# Altium PCB PC110.PcbDoc (part 23 of 24)
Units mm, origin at the board's own origin, x right, y up, seen from the top; angles counter-clockwise.
Board outline 150.05 x 107.35 mm, 10 copper layers (In2.Cu, F.Cu, B.Cu, In1.Cu, In3.Cu, In4.Cu, In5.Cu, In6.Cu, In7.Cu, In8.Cu); 936 components, 1434 nets, 4891 pads, 6088 vias.
Unrouted connection lines stored in the file: 2995.
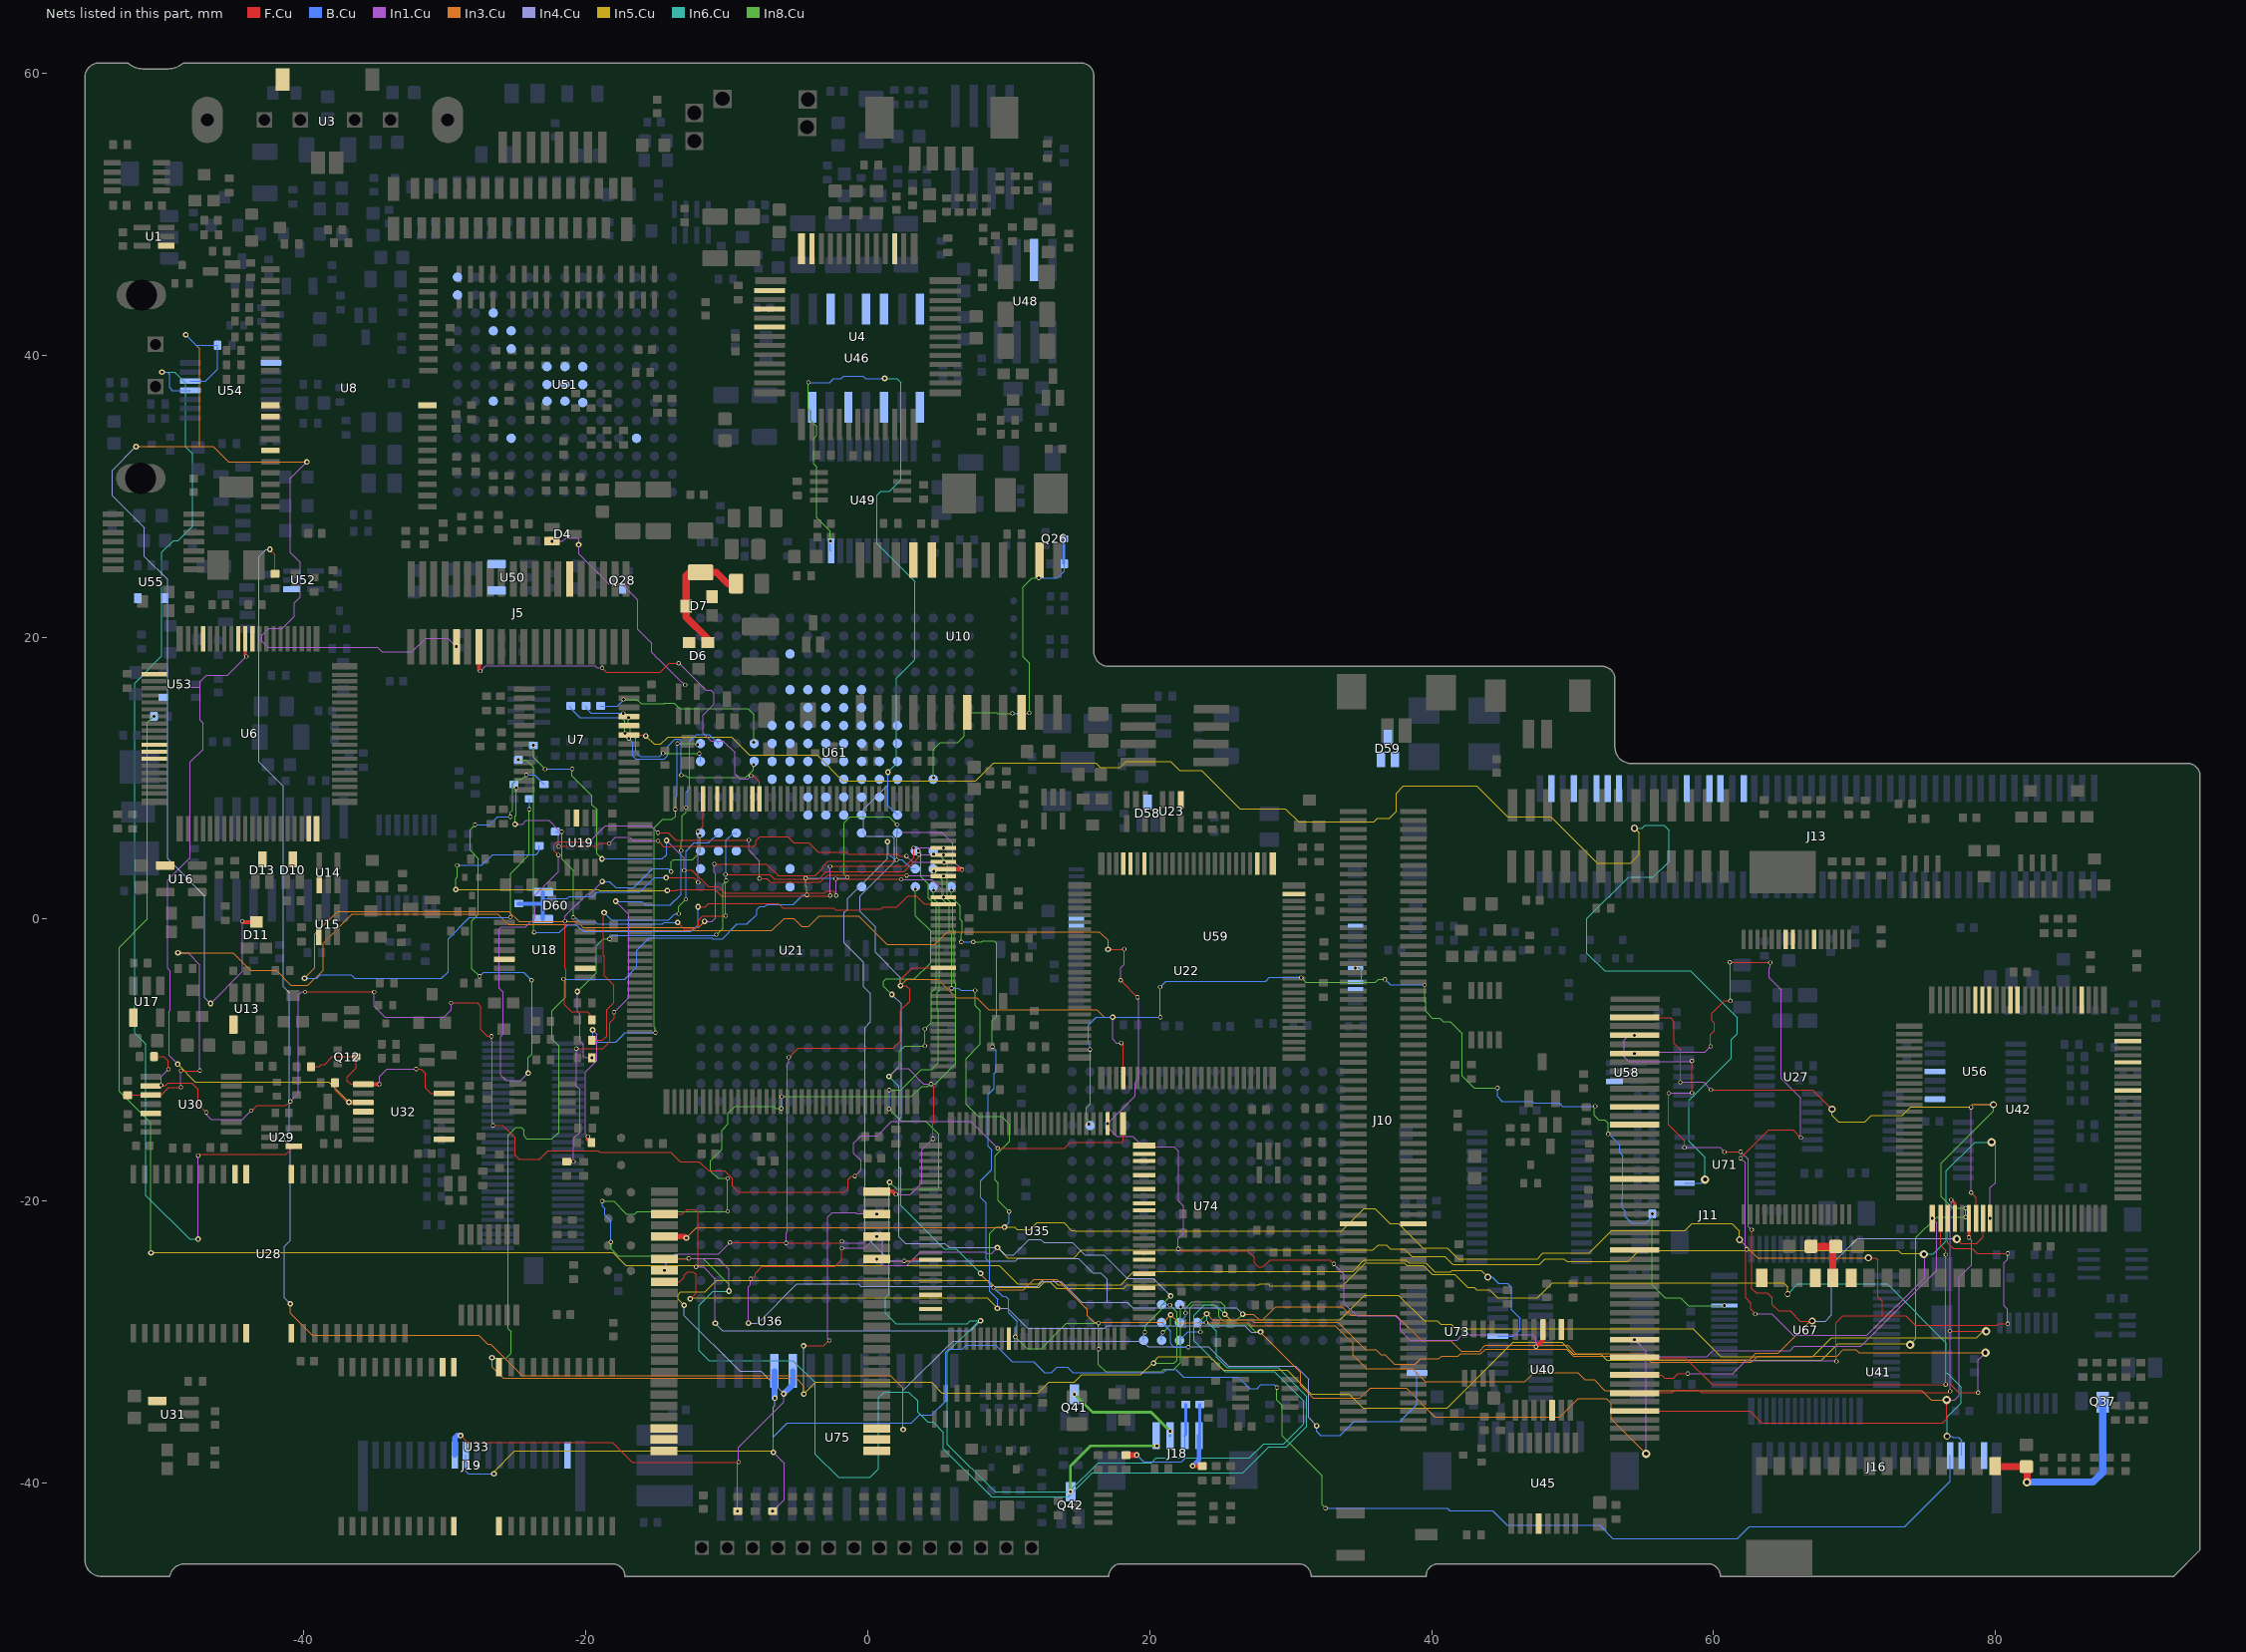
[diagram p30: the nets of this part, all layers, seen from the top]

## Via types
v1: diameter 0.3, hole 0.2, B.Cu to In8.Cu, tented both sides, 1934 vias
v2: diameter 0.4, hole 0.2, F.Cu to B.Cu, tented both sides, 1902 vias
v3: diameter 0.3, hole 0.2, F.Cu to In1.Cu, tented both sides, 1729 vias
v4: diameter 0.6, hole 0.3, F.Cu to B.Cu, tented both sides, 354 vias
v5: diameter 0.5, hole 0.3, F.Cu to B.Cu, tented both sides, 136 vias
v6: diameter 0.4, hole 0.2, B.Cu to In8.Cu, tented both sides, 12 vias
v7: diameter 0.3, hole 0.2, F.Cu to B.Cu, tented both sides, 6 vias
v8: diameter 0.6, hole 0.2, F.Cu to B.Cu, tented both sides, 4 vias
v9: diameter 0.5, hole 0.2, B.Cu to In8.Cu, tented both sides, 3 vias
v10: diameter 0.5, hole 0.2, F.Cu to B.Cu, tented both sides, 2 vias
v11: diameter 0.4, hole 0.3, F.Cu to B.Cu, tented both sides, 2 vias
v12: diameter 0.3, hole 0.2, F.Cu to In4.Cu, tented both sides, 2 vias
v13: diameter 0.6, hole 0.3, B.Cu to In8.Cu, tented both sides, 1 vias
v14: diameter 0.3, hole 0.2, F.Cu to In3.Cu, tented both sides, 1 vias

## Nets (pads, with @x,y where several pads share a name; then routed paths per layer and width w, separated by ;. In a path a pad name is that pad's centre, name@x,y a point inside that pad or via, vN(x,y) a via of type N, cw(c..) or ccw(c..) an arc to the next point about the centre after c; other vN are vias at no path point) (continued)
SD7: R380.1 U21.88 U22.54 U35.42 U36.32 U49.10 U59.35 U61.M12 U67.60 U74.N2 | length 224.4
  F.Cu w0.08: v3(-9.77,-22.93) -5.83,-22.93 v3(-5.8,-22.96) -5.79,-22.95 -1.93,-22.95 v3(-1.83,-22.85) ; v3(-5.6,-9.8) -4.94,-9.14 1.82,-9.14 2.33,-8.63 2.33,-6.46 2.975,-5.815 2.975,-4.985 2.7,-4.71 v2(2.33,-4.71) 2.33,-4.29 3.18,-3.44 U21.88@5.37,-3.44 ; v3(2.583,-24.235) 3.065,-24.235 3.16,-24.14 3.16,-24.13 3.19,-24.1 U35.42@4.46,-24.1 ; v3(17.98,-8.78) 18.13,-8.93 U22.54@18.13,-11.26
  In1.Cu w0.08: v3(-14.42,-24.91) -14.42,-24.54 -13.62,-23.74 -10.58,-23.74 v3(-9.77,-22.93) ; v3(-5.8,-22.96) -5.79,-22.95 -5.79,-22.25 -5.69,-22.15 -5.69,-10.25 -5.6,-10.16 v3(-5.6,-9.8) ; v3(-1.83,-22.85) -1.73,-22.95 -0.28,-22.95 0.5,-22.17 0.91,-22.17 1.05,-22.31 1.05,-23.83 1.455,-24.235 v3(2.583,-24.235) ; v2(17.37,-6.95) 17.37,-8.52 17.63,-8.78 v3(17.98,-8.78)
  In3.Cu w0.08: v2(2.33,-4.71) 2.77,-4.27 4.97,-4.27 6.27,-5.57 7.73,-5.57 8.57,-6.41 16.24,-6.41 16.78,-6.95 v2(17.37,-6.95)
  In4.Cu w0.08: v2(1.44,10.43) 1.44,9.53 -0.29,7.8 -0.29,6.07 -0.1,5.88 1.73,5.88 1.9,5.71 1.9,4.08 -0.55,1.63 -0.55,0.54 0.54,-0.55 0.54,-2.36 2.33,-4.15 v2(2.33,-4.71)
  In6.Cu w0.08: v2(1.21,38.36) 2.065,38.36 2.35,38.075 2.35,31.175 1.525,30.35 0.95,30.35 0.675,30.075 0.675,26.625 3.35,23.95 3.35,18.4 2.05,17.1 2.05,11.04 v2(1.44,10.43)
  In8.Cu w0.08: v1(-4.21,38.07) -4.21,36.22 -4.05,36.06 -4.05,35.36 -3.63,34.94 -3.63,34.32 -3.85,34.1 -3.85,32.31 -3.61,32.07 -3.61,28.48 -2.65,27.52 v1(-2.65,26.82) ; v1(15.68,-14.53) 15.68,-14.33 15.52,-14.17 15.52,-13.37 15.8,-13.09 15.8,-9.27 v1(15.77,-9.24) ; v1(20.74,-4.81) 20.74,-6.93 v1(20.76,-6.95) ; v1(30.75,-4.13) 31.08,-4.46 34.77,-4.46 ; v1(34.59,-3.46) 34.87,-3.46 35.03,-3.62 35.03,-4.46 34.77,-4.46 ; v1(36.69,-4.27) 36.22,-4.27 36.03,-4.46 34.77,-4.46 ; v1(39.5,-4.66) 39.5,-5.86 39.58,-5.94 39.58,-6.53 40.06,-7.01 40.56,-7.01 40.81,-7.26 41.3,-7.26 42.15,-8.11 42.15,-11.11 43.01,-11.97 v1(44.67,-11.97) ; v1(51.61,-13.26) 51.55,-13.32 51.55,-13.93 51.85,-14.23 52.28,-14.23 52.53,-14.48 v1(52.53,-15.23) ; v1(55.65,-20.89) 55.65,-25.92 56.57,-26.84 57.64,-26.84 58.21,-27.41 v1(60.76,-27.41)
  B.Cu w0.08: v1(-4.21,38.07) -2.69,38.07 -2.41,38.35 -1.89,38.35 -1.71,38.53 -0.33,38.53 -0.16,38.36 v2(1.21,38.36) ; v1(-2.65,26.82) -2.65,26.175 U49.10@-2.595,26.12 ; v2(1.44,10.43) 1.44,8.05 2.1,7.39 U61.M12@2.1,7.38 ; U74.N2@15.76,-14.61 v1(15.68,-14.53) 15.68,-14.545 U74.N2@15.765,-14.63 ; v1(15.77,-9.24) 15.77,-8.91 15.66,-8.8 15.66,-7.52 16.23,-6.95 v2(17.37,-6.95) v1(20.76,-6.95) ; v1(20.74,-4.81) 21.15,-4.4 28.23,-4.4 28.5,-4.13 v1(30.75,-4.13) ; v1(36.69,-4.27) 37.08,-4.66 v1(39.5,-4.66) ; v1(44.67,-11.97) 44.67,-12.58 45.01,-12.92 47.15,-12.92 47.27,-13.04 49.06,-13.04 49.28,-13.26 v1(51.61,-13.26) ; v1(52.53,-15.23) 52.57,-15.23 53.33,-15.99 53.33,-16.53 53.56,-16.76 53.56,-19.78 53.5,-19.84 53.5,-20.5 53.71,-20.71 53.71,-21.1 54.17,-21.56 55.21,-21.56 55.65,-21.12 v1(55.65,-20.89)
SD8: J11.44 U36.18 U42.9 U61.N16 U74.A5 | length 209.8
  F.Cu w0.08: v3(59.79,-9.02) 59.79,-8.18 60.07,-7.9 60.07,-7.39 59.87,-7.19 59.87,-6.67 60.75,-5.79 v3(61.19,-5.79) ; v3(61.15,-3.06) 61.16,-3.07 v3(64.02,-3.07) ; v3(61.91,-16.95) 63.91,-14.95 65.65,-14.95 v3(66.19,-15.49) ; v3(62.34,-23.42) 62.27,-23.49 62.27,-26.87 62.64,-27.24 62.64,-27.68 v3(62.96,-28)
  In1.Cu w0.08: v3(0.63,-24.11) 1.09,-24.57 2.77,-24.57 3.74,-23.6 8.31,-23.6 8.42,-23.71 8.78,-23.71 v2(9.2,-23.29) ; v3(54.39,-9.53) 54.48,-9.44 59.37,-9.44 v3(59.79,-9.02) ; v3(61.15,-3.06) 61.19,-3.1 v3(61.19,-5.79) ; v3(61.91,-16.95) 62.24,-17.28 62.24,-23.32 v3(62.34,-23.42) ; v3(62.96,-28) 64.12,-28 65.64,-29.52 70.87,-29.52 74.96,-25.43 74.96,-23.8 v4(74.92,-23.76) ; v3(64.02,-3.07) 64.02,-3.38 63.93,-3.47 63.93,-4.15 64.79,-5.01 64.79,-11.29 66.19,-12.69 v3(66.19,-15.49) ; v3(79.61,-21.225) 79.61,-19.05 79.99,-18.67 79.99,-16.08 v4(79.72,-15.81)
  In4.Cu w0.08: v2(1.71,-5.34) 2.38,-6.01 2.38,-14.02 2.2,-14.2 2.2,-22.53 2.67,-23 5.48,-23 5.77,-23.29 v2(9.2,-23.29) 9.73,-23.82 10.34,-23.82 11.45,-22.71 12.27,-22.71 12.5,-22.94 14.51,-22.94 15.4,-23.83 16.76,-23.83 18.4,-25.47 20.24,-25.47 v2(21.49,-26.72)
  In5.Cu w0.08: v2(9.2,-23.29) 9.2,-23.3 9.91,-24.01 14.61,-24.01 15.15,-23.47 35.85,-23.47 36.21,-23.11 36.78,-23.11 37.07,-23.4 38.08,-23.4 38.6,-23.92 40.94,-23.92 41.5,-24.48 47.65,-24.48 48.04,-24.09 49.39,-24.09 49.59,-24.29 53.93,-24.29 54.71,-23.51 73.11,-23.51 73.32,-23.72 74.88,-23.72 v4(74.92,-23.76)
  In6.Cu w0.08: v4(74.92,-23.76) 75.59,-23.76 76.51,-22.84 76.51,-17.84 78.54,-15.81 v4(79.72,-15.81)
  In8.Cu w0.08: v2(1.71,-5.34) 1.13,-4.76 1.13,-4.4 1.29,-4.24 3.31,-4.24 4.46,-3.09 4.46,-0.84 3.38,0.24 v1(3.38,2.12) ; v1(19.67,-29.29) 19.67,-28.85 20.8,-27.72 20.8,-27.41 v2(21.49,-26.72)
  B.Cu w0.08: U61.N16@3.37,2.3 3.38,2.29 v1(3.38,2.12) ; U74.A5@19.575,-29.87 19.575,-29.385 v1(19.67,-29.29)
SD9: J11.46 U36.20 U42.8 U61.N15 U74.B6 | length 213
  F.Cu w0.08: v3(-8.31,-25.51) -8.2,-25.51 -7.98,-25.29 -7.98,-25.11 -7.95,-25.08 -7.95,-25.07 -7.515,-24.635 -2.305,-24.635 -1.84,-24.17 v3(-1.84,-23.33) ; v3(56.82,-12.34) 56.82,-14.6 57.93,-15.71 v3(57.93,-16.19) ; v3(58.47,-12.31) v3(58.47,-10.06) ; v3(60.76,-16.51) 61.89,-16.51 v3(61.91,-16.49) ; v3(62.7,-22.03) 62.7,-26.12 62.69,-26.13 62.69,-26.17 63.03,-26.51 63.82,-26.51 64.16,-26.85 64.16,-27.34 64.61,-27.79 65.43,-27.79 66.14,-28.5 v5(66.99,-28.5) ; v4(77.25,-22.69) 77.56,-23 78.65,-23 79.11,-22.54 U42.8@79.11,-21.225
  In1.Cu w0.08: v2(-8.46,-28.65) -8.46,-26.07 -8.31,-25.92 v3(-8.31,-25.51) ; v3(-1.84,-23.33) -0.19,-23.33 v3(0.63,-22.51) ; v3(54.39,-8.23) 54.02,-8.23 53.67,-8.58 53.67,-9.77 53.99,-10.09 58.44,-10.09 v3(58.47,-10.06) ; v3(56.82,-12.34) 56.85,-12.31 v3(58.47,-12.31) ; v3(57.93,-16.19) 60.44,-16.19 v3(60.76,-16.51) ; v3(61.91,-16.49) 62.46,-17.04 62.46,-21.79 v3(62.7,-22.03)
  In3.Cu w0.08: v2(26.6,-28.01) 27.35,-28.01 27.76,-28.42 28.04,-28.42 28.96,-27.5 33.64,-27.5 34.23,-28.09 37.48,-28.09 39.29,-29.9 41.36,-29.9 42.11,-30.65 43.39,-30.65 43.81,-30.23 49.66,-30.23 50.24,-30.81 55.2,-30.81 55.62,-31.23 62.55,-31.23 63,-30.78 64.58,-30.78 66.86,-28.5 v5(66.99,-28.5)
  In4.Cu w0.08: v2(-8.46,-28.65) -7.79,-28.65 -5.02,-25.88 -0.66,-25.88 -0.5,-26.04 12.05,-26.04 12.4,-25.69 13.69,-25.69 15.19,-27.19 16.98,-27.19 ; v2(1.4,5.5) 1.4,4.29 -1.44,1.45 -1.44,0.69 -1.67,0.46 -1.67,-1.68 -0.29,-3.06 -0.29,-4.79 0.21,-5.29 0.21,-7.28 -0.19,-7.68 -0.19,-22.46 1.58,-24.23 10.49,-24.23 10.66,-24.06 14.94,-24.06 15.96,-25.08 16.52,-25.08 16.98,-25.54 16.98,-27.19 ; v2(26.6,-28.01) 26.16,-27.57 18.78,-27.57 18.4,-27.19 16.98,-27.19 ; v5(66.99,-28.5) 67.95,-28.5 68.38,-28.07 68.38,-24.49 70.21,-22.66 77.22,-22.66 v4(77.25,-22.69)
  In8.Cu w0.08: v1(22.73,-30.36) 22.85,-30.24 22.85,-27.57 23.08,-27.34 24.53,-27.34 24.9,-27.71 24.9,-28.19 25.2,-28.49 26.12,-28.49 v2(26.6,-28.01)
  B.Cu w0.08: v2(1.4,5.5) 1.47,5.43 1.47,4.66 1.92,4.21 2.44,4.21 3.08,3.57 U61.N15@3.37,3.57 ; U74.B6@20.84,-28.58 21.47,-29.21 21.47,-30.12 21.71,-30.36 v1(22.73,-30.36)
SD10: J11.48 U36.22 U42.7 U61.M13 U74.C6 | length 263.7
  F.Cu w0.08: v2(-4.55,-30.26) -3.11,-30.26 v3(-2.72,-29.87) ; J11.48@54.39,-6.98 56.94,-6.98 57.21,-7.25 57.21,-8.82 57.64,-9.25 v3(57.64,-11.56) ; v3(59.81,-12.1) 67.02,-12.1 v5(68.4,-13.48) ; v3(78.26,-19.39) 78.61,-19.74 U42.7@78.61,-21.225 ; v3(78.26,-13.34) 78.45,-13.15 v5(79.85,-13.15)
  In1.Cu w0.08: v3(-2.72,-29.87) -2.85,-29.74 -2.85,-21.13 -2.53,-20.81 -0.87,-20.81 -0.79,-20.89 0.61,-20.89 v3(0.63,-20.91) ; v3(57.64,-11.56) 59.27,-11.56 v3(59.81,-12.1) ; v3(78.26,-19.39) v3(78.26,-13.34)
  In3.Cu w0.08: v2(-26.65,-31.1) -26.65,-31.77 -25.86,-32.56 -5.08,-32.56 -4.53,-33.11 v2(-4.53,-33.68)
  In4.Cu w0.08: v2(-4.55,-30.26) -4.53,-30.28 v2(-4.53,-33.68)
  In5.Cu w0.08: v2(-4.53,-33.68) -3.69,-32.84 4.5,-32.84 5.26,-33.6 12.07,-33.6 12.84,-32.83 14.66,-32.83 15.18,-32.31 19.37,-32.31 20.2,-31.48 v2(20.27,-31.48) 20.27,-31.41 20.64,-31.04 24.23,-31.04 24.42,-31.23 24.48,-31.23 25.24,-31.99 29.77,-31.99 31.47,-33.69 34.15,-33.69 35.14,-34.68 41.11,-34.68 45.78,-30.01 49.22,-30.01 50.05,-30.84 51.98,-30.84 52.41,-31.27 67.67,-31.27 68.83,-30.11 73.86,-30.11 v4(73.94,-30.19) ; v5(68.4,-13.48) 68.4,-13.93 68.86,-14.39 70.73,-14.39 71.21,-13.91 73.39,-13.91 73.98,-13.32 78.21,-13.32 78.38,-13.15 v5(79.85,-13.15)
  In8.Cu w0.08: v2(-26.65,-31.1) -26.63,-31.12 -25.63,-31.12 -25.29,-30.78 -25.29,-29.26 -25.51,-29.04 -25.51,-15.33 -24.95,-14.77 -24.59,-14.77 -24.39,-14.97 -24.39,-15.37 -24.18,-15.58 -22.39,-15.58 -21.91,-15.1 -21.91,-9.01 -22.4,-8.52 -22.4,-6.5 -21.43,-5.53 -21.43,-4.4 v1(-21.58,-4.25) ; v1(-4.4,2.91) -4.4,2.36 -4.31,2.27 v1(-4.31,1.72) ; v1(-1.45,2.96) -1.67,3.18 -1.67,6.85 -1.25,7.27 1.52,7.27 v1(2.08,6.71) ; v2(20.27,-31.48) 21.73,-31.48 21.95,-31.26 21.95,-27.88 v1(21.44,-27.37) ; v4(73.94,-30.19) 73.94,-30.18 74.35,-29.77 74.35,-22.59 75.81,-21.13 v1(77.87,-21.13) ; v1(77.88,-20.49) 76.96,-20.49 76.13,-19.66 76.13,-17.31 79.85,-13.59 v5(79.85,-13.15)
  B.Cu w0.08: v1(-21.58,-4.25) -17.25,-4.25 -16.39,-3.39 -16.39,-2.22 -15.51,-1.34 -11.06,-1.34 -11.02,-1.38 -10.3,-1.38 -9.27,-0.35 -8.56,-0.35 -7.86,0.35 -7.86,0.69 -7.66,0.89 -7.28,0.89 -7.12,1.05 -5.27,1.05 -4.6,1.72 v1(-4.31,1.72) ; v1(-4.4,2.91) -1.5,2.91 v1(-1.45,2.96) ; v1(2.08,6.71) 2.1,6.69 U61.M13@2.1,6.11 ; U74.C6@20.84,-27.31 21.38,-27.31 v1(21.44,-27.37) ; v1(77.87,-21.13) 77.88,-21.12 v1(77.88,-20.49)
SD11: J11.4 U36.24 U42.6 U61.N14 U74.A6 | length 165.4
  F.Cu w0.08: v3@1.99,-19.52 v3(2,-19.52) ; v3(4.49,-11.69) 4.69,-11.89 4.69,-14.42 4.63,-14.48 v3(4.63,-15.58) ; J11.4@54.39,-34.88 62.55,-34.88 63.41,-35.74 76.26,-35.74 76.54,-35.46 v4(76.54,-34.09)
  F.Cu w0.2: v3(78.11,-22.58) U42.6@78.11,-21.225
  F.Cu w0.3: U36.24@0.63,-19.31 1.78,-19.31 v3@1.99,-19.52
  In1.Cu w0.08: v2(1.51,-11.15) 1.55,-11.15 2.1,-10.6 2.87,-10.6 3.96,-11.69 v3(4.49,-11.69) ; v3(2,-19.52) 3.03,-19.52 3.84,-18.71 3.84,-16.37 v3(4.63,-15.58) ; v4(76.54,-34.09) 77.11,-34.09 77.43,-33.77 77.43,-33.71 77.42,-33.7 77.42,-25.4 78.31,-24.51 78.31,-22.78 v3(78.11,-22.58)
  In3.Cu w0.08: v2(8,-25.12) 8,-25.19 9.09,-26.28 11.067,-26.28 11.797,-25.55 13.43,-25.55 15.59,-27.71 15.59,-28.12 16.05,-28.58 20.97,-28.58 v2(21.49,-28.06) 22.05,-28.62 27,-28.62 27.2,-28.82 33.15,-28.82 34.42,-30.09 34.42,-30.91 35.39,-31.88 38.63,-31.88 39.56,-32.81 46.61,-32.81 47.27,-32.15 50.37,-32.15 50.88,-32.66 51.52,-32.66 52.28,-33.42 74.78,-33.42 75.45,-34.09 v4(76.54,-34.09)
  In6.Cu w0.08: v2(1.51,-11.15) 2.22,-11.86 2.22,-17.54 2.34,-17.66 2.34,-20.31 5.43,-23.4 6.28,-23.4 v2(8,-25.12)
  In8.Cu w0.08: v2(1.51,-11.15) 2.25,-10.41 2.25,-9.37 2.63,-8.99 v1(4.05,-8.99) ; v1(3.59,4.85) 3.77,4.67 3.77,3.02 4.29,2.5 4.29,1.51 4.87,0.93 4.87,-4.81 4.5,-5.18 4.5,-7.33 v1(4.05,-7.78) ; v1(20.93,-29.3) 20.94,-29.3 21.49,-28.75 v2(21.49,-28.06)
  B.Cu w0.08: v1(4.05,-8.99) v1(4.05,-7.78) ; U74.A6@20.845,-29.87 20.845,-29.385 v1(20.93,-29.3)
SD12: J11.6 U36.27 U42.4 U61.P16 U74.B7 | length 234.2
  F.Cu w0.08: U36.27@-14.42,-20.91 -13.15,-20.91 -12.82,-20.58 -12.23,-20.58 -12.05,-20.76 -12.05,-24.53 v3(-12.18,-24.66) ; J11.6@54.39,-33.63 54.435,-33.585 57.05,-33.585 57.05,-33.57 57.24,-33.38 58.925,-33.38 59.13,-33.585 76.685,-33.585 v3(76.78,-33.49) ; v3(76.77,-29.21) 76.8,-29.24 v4(79.34,-29.24)
  F.Cu w0.2: v3(76.85,-19.9) 77.11,-20.16 U42.4@77.11,-21.225
  In1.Cu w0.08: v3(-12.18,-24.66) -11.66,-24.66 -10.82,-25.5 v2(-10.82,-28.66) ; v3(76.78,-33.49) 76.78,-29.22 v3(76.77,-29.21) 76.77,-20.64 76.85,-20.56 v3(76.85,-19.9)
  In4.Cu w0.08: v2(-10.82,-28.66) -10.3,-29.18 7.3,-29.18 v2(8,-28.48)
  In5.Cu w0.08: v2(25.33,-28.02) 25.72,-28.41 33.49,-28.41 35.24,-26.66 37.64,-26.66 39.47,-28.49 40.41,-28.49 40.66,-28.74 41.38,-28.74 41.69,-29.05 58.54,-29.05 60.53,-31.04 67.02,-31.04 68.36,-29.7 78.66,-29.7 79.12,-29.24 v4(79.34,-29.24)
  In6.Cu w0.08: v2(1.55,-18.65) 1.49,-18.71 1.49,-26.62 1.25,-26.86 1.25,-27.94 2,-28.69 7.06,-28.69 7.27,-28.48 v2(8,-28.48) 7.89,-28.48 5.66,-30.71 5.66,-37.26 9.02,-40.62 14.26,-40.62 16.34,-38.54 20.13,-38.54 20.45,-38.22 27.07,-38.22 28.08,-37.21 29.52,-37.21 30.92,-35.81 30.92,-34.17 28.83,-32.08 25.33,-32.08 23.15,-29.9 23.15,-28.08 23.88,-27.35 24.66,-27.35 v2(25.33,-28.02)
  In8.Cu w0.08: v1(1.51,-13.45) 2.36,-14.3 4.09,-14.3 5.03,-15.24 5.03,-19.05 4.92,-19.16 2.06,-19.16 v2(1.55,-18.65) ; v1(1.53,-12.11) 2.35,-12.11 3.8,-10.66 4.53,-10.66 5.01,-10.18 5.01,-6.44 4.95,-6.38 4.95,-5.18 5.07,-5.06 5.07,1.06 4.67,1.46 v1(4.67,2.06) ; v1(22.54,-27.93) 22.54,-27.6 23,-27.14 25.03,-27.14 25.33,-27.44 v2(25.33,-28.02)
  B.Cu w0.08: v1(1.51,-13.45) 1.53,-13.43 v1(1.53,-12.11) ; U61.P16@4.64,2.3 4.67,2.27 v1(4.67,2.06) ; U74.B7@22.11,-28.58 22.54,-28.15 v1(22.54,-27.93)
SD13: J11.8 U36.29 U42.3 U61.P15 U74.C7 | length 199.3
  F.Cu w0.08: J11.8@54.39,-32.33 56.31,-32.33 56.53,-32.55 57.15,-32.55 57.47,-32.23 v3(58.16,-32.23) ; v3(68.72,-31.36) 68.69,-31.33 68.69,-28.61 69.17,-28.13 71.67,-28.13 71.97,-28.13 ; v5(70.98,-24.02) 71.51,-24.02 71.67,-24.18 71.67,-26.79 71.97,-27.09 71.97,-28.13 ; U42.3@76.61,-21.225 76.61,-22.98 76.98,-23.35 78.33,-23.35 78.69,-23.71 v3(80.86,-23.71) ; v3(80.86,-28.7) 80.2,-28.7 80.11,-28.79 74.31,-28.79 73.65,-28.13 71.97,-28.13
  F.Cu w0.4: U36.29@-14.42,-22.51 -12.97,-22.51 v2(-12.87,-22.61)
  In1.Cu w0.08: v3(58.16,-32.23) 61.38,-32.23 62.29,-31.32 68.68,-31.32 v3(68.72,-31.36) ; v3(80.86,-28.7) 80.86,-27.68 80.6,-27.42 80.6,-24.38 80.86,-24.12 v3(80.86,-23.71)
  In3.Cu w0.08: v2(-12.87,-22.61) -12.13,-21.87 9.48,-21.87 9.51,-21.84 v2(9.7,-21.84) ; v5(61.84,-22.73) 63.13,-24.02 v5(70.98,-24.02)
  In5.Cu w0.08: v2(9.7,-21.84) 10.42,-21.84 10.6,-22.02 11.52,-22.02 12.01,-21.53 13.9,-21.53 14.46,-22.09 14.66,-22.09 14.685,-22.115 33.595,-22.115 35.19,-20.52 35.99,-20.52 37.05,-21.58 37.65,-21.58 39.39,-23.32 41.1,-23.32 41.87,-24.09 47.5,-24.09 47.91,-23.68 51.17,-23.68 52.77,-22.08 57.96,-22.08 58.45,-21.59 61.31,-21.59 61.84,-22.12 v5(61.84,-22.73)
  In8.Cu w0.08: v1(4.69,3.39) 5.29,2.79 5.29,1.42 5.79,0.92 5.79,-0.81 5.95,-0.97 5.95,-4.89 v1(5.94,-4.9) ; v1(7.62,-5.05) 7.62,-6.13 7.99,-6.5 7.99,-8.87 6.99,-9.87 6.99,-13.14 7.82,-13.97 9.49,-13.97 10.07,-14.55 10.07,-15.74 9.02,-16.79 9.02,-18.5 9.25,-18.73 9.25,-19.96 v1(10.03,-20.74) ; v1(8.92,-26.13) 8.65,-25.86 8.65,-22.29 9.1,-21.84 v2(9.7,-21.84) ; v1(10.46,-29.62) 11.29,-30.45 12.31,-30.45 14.11,-28.65 v1(16.37,-28.65) ; v1(16.37,-30.495) 16.37,-31.58 16.88,-32.09 20.86,-32.09 21.03,-31.92 21.72,-31.92 22.2,-31.44 v1(22.2,-27.5)
  B.Cu w0.08: U61.P15@4.64,3.57 4.69,3.52 v1(4.69,3.39) ; v1(5.94,-4.9) 6.43,-4.9 6.58,-5.05 v1(7.62,-5.05) ; v1(8.92,-26.13) 9.55,-26.76 9.78,-26.76 9.99,-26.97 9.99,-27.93 10.58,-28.52 10.58,-28.84 10.53,-28.89 10.53,-29.55 v1(10.46,-29.62) ; v2(9.7,-21.84) 10.03,-21.51 v1(10.03,-20.74) ; v1(16.37,-30.495) v1(16.37,-28.65) ; U74.C7@22.11,-27.34 22.2,-27.43 v1(22.2,-27.5) ; U74.C7@22.11,-27.31 22.2,-27.4 v1(22.2,-27.5) ; U74.C7@22.115,-27.33 22.2,-27.415 v1(22.2,-27.5)
SD14: J11.10 U36.31 U42.2 U61.P14 U74.A7 | length 253.6
  F.Cu w0.08: U36.31@-14.42,-24.11 -12.75,-24.11 v3(-12.7,-24.06) ; J11.10@54.39,-31.08 57.98,-31.08 59.9,-33 v3(76.46,-33) 76.81,-33 77.38,-33.57 v3(78.76,-33.57) ; U42.2@76.11,-21.225 76.11,-23.15 76.47,-23.51 v3(76.47,-23.79)
  In1.Cu w0.08: v3(-12.7,-24.06) -10.61,-24.06 -9.84,-24.83 v2(-9.84,-26.38) ; v3(76.46,-33) 76.47,-32.99 v3(76.47,-23.79) ; v3(78.76,-33.57) 78.76,-31.27 v4(79.28,-30.75)
  In3.Cu w0.08: v2(24.05,-27.99) 24.46,-28.4 27.21,-28.4 27.4,-28.59 33.37,-28.59 35.32,-30.54 36.06,-30.54 36.4,-30.88 36.69,-30.88 37.35,-31.54 38.86,-31.54 39.22,-31.18 40.52,-31.18 40.71,-30.99 41.9,-30.99 42.06,-30.83 43.49,-30.83 43.84,-30.48 49.55,-30.48 50.05,-30.98 55.07,-30.98 55.52,-31.43 62.68,-31.43 63.13,-30.98 68.74,-30.98 69.18,-30.54 70.09,-30.54 70.3,-30.75 v4(79.28,-30.75)
  In6.Cu w0.08: v2(-9.84,-26.38) -10.97,-26.38 -11.97,-27.38 -11.97,-30.59 -11.26,-31.3 -5.3,-31.3 -3.72,-32.88 -3.72,-37.96 -2.08,-39.6 0.15,-39.6 0.78,-38.97 0.78,-33.92 1.18,-33.52 2.895,-33.52 3.55,-34.175 3.55,-34.95 4.27,-35.67 4.645,-35.67 5.36,-36.385 5.36,-37.55 8.78,-40.97 14.22,-40.97 15.93,-39.26 26.61,-39.26 28.45,-37.42 29.7,-37.42 31.15,-35.97 31.15,-33.86 29.11,-31.82 25.49,-31.82 24.73,-31.06 24.73,-29.22 24.05,-28.54 v2(24.05,-27.99)
  In8.Cu w0.08: v1(-18.83,-20) -18.02,-20 -17.12,-20.9 -16.53,-20.9 -16.35,-20.72 v1(-9.94,-20.72) ; v1(-18.22,-22.89) -18.22,-23.36 -17.68,-23.9 -14.76,-23.9 -14.61,-24.05 -11.69,-24.05 -9.84,-25.9 v2(-9.84,-26.38) ; v1(-9.94,-18.38) -10.63,-18.38 -11.15,-17.86 -11.15,-17.14 -10.34,-16.33 -10.34,-14.97 -9.9,-14.53 -9.9,-13.74 -9.42,-13.26 -6.67,-13.26 -6.51,-13.42 v1(-6.13,-13.42) ; v1(-6.1,-12.58) 3.11,-12.58 3.84,-11.85 4.27,-11.85 4.42,-11.7 4.78,-11.7 6.25,-10.23 6.25,-4.57 6.15,-4.47 6.15,-0.87 6.02,-0.74 6.02,1.03 5.63,1.42 5.63,3.99 5.01,4.61 v1(4.67,4.61) ; v1(23.6,-29.27) 23.6,-28.44 v2(24.05,-27.99)
  B.Cu w0.08: v1(-18.83,-20) -18.83,-20.35 -18.64,-20.54 -18.64,-20.99 -18.22,-21.41 v1(-18.22,-22.89) ; v1(-9.94,-20.72) v1(-9.94,-18.38) ; v1(-6.13,-13.42) -6.1,-13.39 v1(-6.1,-12.58) ; U74.A7@22.115,-29.87 22.12,-29.87 22.72,-29.27 v1(23.6,-29.27)
SD15: J11.12 U36.33 U42.1 U61.R16 U74.B8 | length 154.3
  F.Cu w0.08: U36.33@-14.42,-25.71 -13.33,-25.71 -13.02,-25.4 -13.02,-25.25 -12.78,-25.01 -12.38,-25.01 -12.18,-25.21 -12.18,-26.52 v2(-12.59,-26.93)
  In1.Cu w0.08: v3(54.39,-29.83) 55.22,-30.66 v4(55.22,-37.91) ; 55.22,-31.01 59.52,-31.01 59.94,-30.59 65.44,-30.59 65.73,-30.3 70.44,-30.3 75.84,-24.9 75.84,-21.555 v3(75.51,-21.225)
  In3.Cu w0.08: v2(27.86,-29.27) 27.86,-29.29 30.71,-32.14 30.71,-33.08 31.6,-33.97 34.93,-33.97 35.65,-33.25 38.19,-33.25 40.23,-35.29 49.1,-35.29 50.39,-34 52.35,-34 52.37,-34.02 52.42,-34.02 52.75,-34.35 52.75,-35.44 v4(55.22,-37.91)
  In4.Cu w0.08: v2(9.2,-27.6) 9.93,-27.6 11.33,-29 16.8,-29 16.97,-28.83 26.76,-28.83 27.21,-29.28 27.21,-29.3 27.83,-29.3 v2(27.86,-29.27)
  In5.Cu w0.08: v2(-12.59,-26.93) -12.53,-26.87 8.47,-26.87 v2(9.2,-27.6)
  In8.Cu w0.08: v1(5.94,2.06) 5.94,1.58 6.57,0.95 6.57,-0.02 6.71,-0.16 6.71,-0.97 6.64,-1.04 v1(6.64,-1.61) ; v1(7.48,-1.61) 8.1,-1.61 8.16,-1.55 8.96,-1.55 9.14,-1.73 9.14,-6.9 8.84,-7.2 v1(8.84,-9.04) ; v1(23.99,-28.6) 24.17,-28.78 26.99,-28.78 27.48,-29.27 v2(27.86,-29.27)
  B.Cu w0.08: U61.R16@5.91,2.3 5.94,2.27 v1(5.94,2.06) ; v1(6.64,-1.61) v1(7.48,-1.61) ; v1(8.84,-9.04) 9.12,-9.32 9.12,-10.79 8.97,-10.94 8.97,-11.99 8.54,-12.42 8.54,-16.09 8.8,-16.35 8.8,-17.78 8.02,-18.56 8.02,-19.76 8.41,-20.15 8.41,-24.11 8.64,-24.34 8.64,-26.39 9.2,-26.95 v2(9.2,-27.6) ; U74.B8@23.38,-28.58 23.4,-28.6 v1(23.99,-28.6)
Touch_X+: J18.2 R207.2 R386.1 | length 8.3
  F.Cu w0.08: v2@19.07,-38.01 v2(19.08,-38)
  F.Cu w0.4: R207.2@18.32,-38.01 v2@19.07,-38.01
  B.Cu w0.08: v2(19.08,-38) 19.58,-38.5 22.25,-38.5 22.5,-38.25 J18.2@22.5,-36.63
  B.Cu w0.2: J18.2@22.5,-36.63 22.56,-36.57 R386.1@22.56,-34.42
Touch_X-: J18.3 Q41.2 | length 8.2
  In8.Cu w0.2: v6(14.66,-33.69) 15.94,-34.97 20.1,-34.97 v6(21.45,-36.32)
  B.Cu w0.2: J18.3@21.45,-36.63 v6(21.45,-36.32)
Touch_Y+: J18.1 R208.2 R388.1 | length 5.3
  F.Cu w0.3: v2(23.05,-38.78) 23.73,-38.78 R208.2@23.74,-38.79
  B.Cu w0.2: J18.1@23.5,-36.63 23.56,-36.57 R388.1@23.56,-34.42
  B.Cu w0.3: v2(23.05,-38.78) 23.5,-38.33 J18.1@23.5,-36.63
Touch_Y-: J18.4 Q42.2 | length 8.5
  In8.Cu w0.2: v6(14.38,-40.61) 14.38,-38.78 15.8,-37.36 v6(20.5,-37.36)
TRKPD_Lclick: J16.4 J19.10 R206.1 U75.4 | length 136.7
  In1.Cu w0.08: v3(-6.74,-41.99) -6.73,-41.99 -5.91,-41.17 -5.91,-38.61 v2(-6.7,-37.82)
  In4.Cu w0.08: v2(-6.7,-37.82) -6.7,-34.6 -6.59,-34.49 v2(-6.59,-33.97)
  In5.Cu w0.08: v2(-26.51,-39.33) -26.51,-39.18 -25.05,-37.72 -6.8,-37.72 v2(-6.7,-37.82)
  In8.Cu w0.08: v1(29.03,-33.22) 29.03,-34.11 29.42,-34.5 29.42,-36.65 32.23,-39.46 32.23,-41.54 v1(32.47,-41.78)
  B.Cu w0.08: J19.10@-28.5,-38 -28.5,-39.16 -28.33,-39.33 v2(-26.51,-39.33) ; v2(-6.7,-37.82) -6.7,-36.73 -5.71,-35.74 3.09,-35.74 3.67,-35.16 4.52,-35.16 5.52,-34.16 5.52,-30.7 5.71,-30.51 6.71,-30.51 6.99,-30.23 9.09,-30.23 10.23,-31.37 11.76,-31.37 12.53,-32.14 13.05,-32.14 13.43,-31.76 14.15,-31.76 14.55,-32.16 20.96,-32.16 21.19,-31.93 21.86,-31.93 22.39,-32.46 26.27,-32.46 27.09,-33.28 27.62,-33.28 27.89,-33.01 28.82,-33.01 v1(29.03,-33.22) ; v1(32.47,-41.78) 41.11,-41.78 41.29,-41.96 44.32,-41.96 45.34,-42.98 51.92,-42.98 52.86,-43.92 61.69,-43.92 62.54,-43.07 73.58,-43.07 76.79,-39.86 J16.4@76.79,-38.04
  B.Cu w0.4: U75.4@-6.61,-32.04 -6.61,-33.95 v2(-6.59,-33.97)
TRKPD_Rclick: J16.3 J19.11 R196.1 U75.5 | length 150.4
  F.Cu w0.08: v2(-28.88,-36.62) -28.4,-37.1 -18.1,-37.1 -16.69,-38.51 v3(-9.16,-38.51)
  In1.Cu w0.08: v3(-9.24,-41.99) -9.24,-38.59 v3(-9.16,-38.51) -9.16,-37.45 -5.96,-34.25 v2(-5.96,-33.66)
  In4.Cu w0.08: v2(-13.02,-27.39) -13.02,-28.11 -9.08,-32.05 -7.57,-32.05 v2(-5.96,-33.66)
  In5.Cu w0.08: v2(-13.02,-27.39) -13.45,-26.96 -13.45,-26.63 -13.26,-26.44 -11.55,-26.44 -10.73,-25.62 8.54,-25.62 9.02,-26.1 12.16,-26.1 12.54,-25.72 12.93,-25.72 13.39,-26.18 18.15,-26.18 18.39,-25.94 27.73,-25.94 27.8,-25.87 28.4,-25.87 28.52,-25.99 33.68,-25.99 35.3,-24.37 38.05,-24.37 38.23,-24.55 39.42,-24.55 40.06,-25.19 41.63,-25.19 42.55,-26.11 43.01,-26.11 43.18,-26.28 44.11,-26.28 44.67,-26.84 47.49,-26.84 48.55,-25.78 64.97,-25.78 65.25,-26.06 v11(65.25,-26.59)
  In6.Cu w0.08: v11(65.25,-26.59) 65.96,-25.88 72.31,-25.88 76.51,-30.08 76.51,-32.2 76.55,-32.2 77.54,-33.19 77.54,-34.31 76.56,-35.29 v5(76.56,-36.68)
  B.Cu w0.08: v5(76.56,-36.68) 76.93,-36.68 76.99,-36.74 77.38,-36.74 77.59,-36.95 J16.3@77.59,-38.04
  B.Cu w0.4: J19.11@-29.3,-38 -29.3,-36.8 -29.12,-36.62 v2(-28.88,-36.62) ; v2(-5.96,-33.66) -5.31,-33.01 U75.5@-5.31,-32.04
U8_1A3_KB_TP139: R283.2 U73.6 | length 144.4
  In5.Cu w0.08: v2(-50.84,-23.66) -50.8,-23.62 -18.08,-23.62 -17.15,-24.55 9.33,-24.55 10.64,-25.86 12.12,-25.86 12.45,-25.53 13.09,-25.53 13.49,-25.93 17.93,-25.93 18.88,-24.98 34.41,-24.98 35.21,-24.18 38.18,-24.18 38.37,-24.37 39.59,-24.37 40.22,-25 41.36,-25 41.46,-24.9 43.52,-24.9 43.52,-24.91 v5(43.99,-25.38)
  In8.Cu w0.08: v2(-50.84,-23.66) -50.84,-14.45 -53.08,-12.21 -53.08,-1.99 -51.09,0 -51.09,13.94 v1(-50.63,14.4)
  B.Cu w0.08: v5(43.99,-25.38) 44.3,-25.38 44.76,-25.84 45.4,-25.84 45.67,-26.11 45.67,-27.69 46.27,-28.29 46.27,-29.1 45.795,-29.575 U73.6@44.693,-29.575
U8_2A1_KB_RXD: R38.2 U73.11 | length 155.1
  F.Cu w0.08: v2(-42.41,26.23) -42.04,25.86 R38.2@-42.04,24.5
  In3.Cu w0.08: v2(-40.96,-27.28) -40.96,-27.95 -39.39,-29.52 -27.6,-29.52 -26.97,-30.15 -26.74,-30.15 -24.51,-32.38 1.63,-32.38 2.51,-33.26 v2(2.51,-36.2)
  In4.Cu w0.08: v2(-42.41,26.23) -42.69,26.23 -43.19,25.73 -43.19,11.16 -41.45,9.42 -41.45,-4.79 -41.01,-5.23 -41.01,-14.99 -41.34,-15.32 -41.34,-15.67 -40.96,-16.05 -40.96,-22.8 -41.39,-23.23 -41.39,-26.85 v2(-40.96,-27.28) ; v2(2.51,-36.2) 2.51,-33.44 6.02,-29.93 19.51,-29.93 19.9,-30.32 24.18,-30.32 25.57,-31.71 30.35,-31.71 31.26,-32.62 31.26,-35.35 v2(31.84,-35.93)
  B.Cu w0.08: v2(31.84,-35.93) 31.84,-36.33 32.12,-36.61 33.5,-36.61 34.49,-35.62 37.75,-35.62 38.96,-34.41 38.96,-32.183 U73.11@38.967,-32.175
U21_97: R330.1 U21.97 | length 44.9
  F.Cu w0.08: v2(-12.04,0.88) -11.53,0.88 -11.29,1.12 -6.35,1.12 -6.03,0.8 -2.42,0.8 -2.26,0.64 -0.5,0.64 -0.4,0.74 0.93,0.74 1.07,0.88 2.08,0.88 2.84,1.64 3.44,1.64 4.02,1.06 U21.97@5.37,1.06
  In8.Cu w0.08: v1(-24.77,11.31) -24.23,11.31 -23.7,10.78 -23.7,-0.89 v1(-23.66,-0.93)
  B.Cu w0.08: v1(-23.66,-0.93) -21.85,-0.93 -21.31,-0.39 -20.65,-0.39 -20.17,-0.87 -12.52,-0.87 -12.04,-0.39 v2(-12.04,0.88)
U21_98: R355.2 U21.98 | length 40.9
  F.Cu w0.08: v3(-13.02,3.47) -12.48,3.47 -11.31,2.3 -10.59,2.3 -10.15,1.86 -3.04,1.86 -2.89,2.01 -2.45,2.01 -2.24,1.8 v3(-2.24,1.68) ; v3(-2.28,2.86) -2.25,2.83 v3(2.37,2.83)
  In1.Cu w0.08: v2(-14.27,5.58) -13.02,4.33 v3(-13.02,3.47) ; v3(-2.28,2.86) -2.24,2.82 v3(-2.24,1.68) ; v3(2.37,2.83) 2.39,2.81 4.55,2.81 5.37,1.99 v3(5.37,1.56)
  In8.Cu w0.08: v1(-23.72,12.33) -23.72,11.48 v1(-22.89,10.65) ; v1(-20.97,10.66) -20.97,10.17 -19.55,8.75 -19.55,8.11 -19.23,7.79 -19.23,4.66 v6(-18.85,4.28)
  B.Cu w0.08: v1(-22.89,10.65) -20.98,10.65 v1(-20.97,10.66) ; v6(-18.85,4.28) -14.57,4.28 -14.27,4.58 v2(-14.27,5.58)
U21_101: R328.2 U21.101 | length 83.3
  F.Cu w0.08: v3(-21.94,4.55) -22.26,4.87 -22.26,5.26 -22.03,5.49 v3(-19.75,5.49) ; v3(-14.89,6.13) -14.14,6.13 -13.63,5.62 v3(-8.43,5.62) ; v3(-7.68,2.88) -7.14,2.88 -6.9,2.64 -3.36,2.64 -2.86,3.14 2.73,3.14 v3(2.77,3.1)
  In1.Cu w0.08: v2(-24.08,-10.92) -24.61,-11.45 -25.64,-11.45 -26.04,-11.05 -26.04,-8.34 -25.85,-8.15 -25.85,-5.18 -26.14,-4.89 -26.14,-0.7 -26,-0.56 -24.27,-0.56 -23.61,0.1 -23.61,0.84 -23.72,0.95 -23.72,1.6 -21.94,3.38 v3(-21.94,4.55) ; v3(-19.75,5.49) -18.62,6.62 -15.38,6.62 v3(-14.89,6.13) ; v3(-8.43,5.62) -8.43,4.88 -7.68,4.13 v3(-7.68,2.88) ; v3(2.77,3.1) 5.33,3.1 v3(5.37,3.06)
  In8.Cu w0.08: v1(-27.85,6.7) -28.21,6.34 -28.21,4.9 -27.61,4.3 -27.61,0.35 -28.07,-0.11 -28.07,-3.51 v1(-27.53,-4.05) ; v1(-25.35,7.26) -25.35,7.57 -25.2,7.72 -25.2,9.6 -24.9,9.9 -24.54,9.9 v1(-24.21,10.23) ; v2(-24.08,-10.92) -24.08,-9.81 -23.82,-9.55 -23.82,-4.35 v1(-23.84,-4.33)
  B.Cu w0.08: v1(-27.85,6.7) -26.81,6.7 -26.25,7.26 v1(-25.35,7.26) ; v1(-27.53,-4.05) -27.245,-3.765 -24.405,-3.765 v1(-23.84,-4.33) ; v1(-24.21,10.23) -23.62,10.23 -22.96,9.57 R328.2@-22.96,9.55
U21_102: R339.1 U21.102 | length 87.6
  F.Cu w0.08: v3(-10.89,3.92) -7.19,3.92 -6.35,3.08 -3.72,3.08 -3.15,3.65 -3.15,3.78 -2.82,4.11 1.97,4.11 v3(2.06,4.2)
  F.Cu w0.3: U21.102@5.37,3.56 6.64,3.56 v3(6.69,3.51)
  In1.Cu w0.08: v2(-11.57,-0.15) -11.03,-0.15 -10.79,0.09 -10.79,3.25 -10.89,3.35 v3(-10.89,3.92) ; v3(2.06,4.2) 2.06,6.07 2.15,6.16 5.26,6.16 6.04,5.38 6.04,4.16 v3(6.69,3.51)
  In3.Cu w0.08: v2(-39.95,-4.19) -39.21,-3.45 -39.21,-1.04 -37.61,0.56 -25.47,0.56 -24.735,-0.175 -20.615,-0.175 -20.2,-0.59 -12.01,-0.59 v2(-11.57,-0.15)
  In8.Cu w0.08: v1(-25.34,0.14) -25.34,3.24 -24.01,4.57 v1(-24.01,7.8)
  B.Cu w0.08: v2(-39.95,-4.19) -39.08,-4.19 -38.83,-3.94 -36.65,-3.94 -36.39,-4.2 -30.24,-4.2 -29.76,-3.72 -29.76,-1.39 -28.26,0.11 -25.37,0.11 v1(-25.34,0.14) ; v1(-24.01,7.8) -23.99,7.82 R339.1@-23.99,8.53
U21_103: R336.2 U21.103 | length 36.3
  F.Cu w0.08: v3(-21.92,5.17) -19.22,5.17 -19.01,5.38 v3(-18.34,5.38) ; v3(-14.88,5.55) -14.46,5.13 -14,5.13 -13.94,5.19 -8.06,5.19 -7.93,5.32 -7.93,5.55 -7.64,5.84 -5.66,5.84 -5.26,5.44 -4.17,5.44 -3.5,4.77 -1.51,4.77 -1.35,4.61 2.11,4.61 2.24,4.48 v3(2.75,4.48)
  In1.Cu w0.08: v2(-25.02,6.74) -24.48,6.74 -24.22,7 -22.61,7 -21.92,6.31 v3(-21.92,5.17) ; v3(-18.34,5.38) -17.92,5.8 -16.87,5.8 -16.62,5.55 v3(-14.88,5.55) ; v3(2.75,4.48) 3.19,4.04 5.4,4.04 v3(5.42,4.02)
  In8.Cu w0.08: v2(-25.02,6.74) -25.02,7.29 -24.93,7.38 -24.93,9.3 v1(-24.92,9.31)
U21_104: R351.2 U21.104 | length 38.1
  F.Cu w0.08: v2(-13.49,-0.23) -13.03,-0.69 -12.25,-0.69 -12.01,-0.45 -12.01,-0.08 -11.71,0.22 -10.1,0.22 v3(-10.08,0.24) ; v3(-10.09,3.18) -6.96,3.18 -6.63,2.85 -3.46,2.85 -2.95,3.36 2.57,3.36 3.62,4.41 v3(3.62,4.58)
  In1.Cu w0.08: v3(-10.09,3.18) -10.09,0.25 v3(-10.08,0.24) ; v3(3.62,4.58) 3.64,4.56 v3(5.37,4.56)
  In8.Cu w0.08: v1(-21.7,6.21) -21.7,4.27 -20.89,3.46 v1(-20.89,0.12)
  B.Cu w0.08: R351.2@-22.15,6.22 -22.14,6.21 v1(-21.7,6.21) ; v1(-20.89,0.12) -20.72,0.12 -20.4,-0.2 -19.32,-0.2 -19.17,-0.35 -14.56,-0.35 -14.44,-0.23 v2(-13.49,-0.23)
U21_105: R331.1 U21.105 | length 46.2
  F.Cu w0.08: v2(-14.22,2.03) -13.57,2.03 -13.51,2.09 -10.82,2.09 -10.37,1.64 -2.7,1.64 v3(-2.66,1.68) ; v3(-2.66,3.75) -2.65,3.76 2.66,3.76 3.26,4.36 v3(3.26,5.05)
  In1.Cu w0.08: v3(-2.66,1.68) v3(-2.66,3.75) ; v3(3.26,5.05) 3.27,5.06 v3(5.37,5.06)
  In5.Cu w0.08: v2(-29.22,2.1) -19.1,2.1 -19.03,2.03 v2(-14.22,2.03)
  In8.Cu w0.08: v2(-29.22,2.1) -29.22,2.88 -29.12,2.98 v1(-29.12,3.82)
  B.Cu w0.08: v1(-29.12,3.82) -27.37,3.82 -26.6,4.59 -23.54,4.59 -23.31,4.82 R331.1@-23.31,5.2
U21_131: J5.27 U21.131 | length 30.7
  F.Cu w0.08: v3(-18.85,17.83) -18.54,17.52 -14.72,17.52 -14.08,18.16 v3(-13.41,18.16) ; v3(-8.28,10.19) -8.13,10.19 -7.68,9.74 U21.131@-7.68,8.535 U21.131@-7.645,8.535
  F.Cu w0.3: J5.27@-27.58,19.33 -27.58,17.7 v3(-27.48,17.6)
  In1.Cu w0.08: v3(-27.48,17.6) -27.1,17.98 -19.35,17.98 -19.2,17.83 v3(-18.85,17.83) ; v3(-13.41,18.16) -13.39,18.16 -11.47,16.24 -11.13,16.24 -10.9,16.01 -10.9,15.26 -11.67,14.49 -11.67,13.2 -11.11,12.64 -10.25,12.64 -9.43,11.82 -9.43,10.31 -9.08,9.96 -8.51,9.96 v3(-8.28,10.19)
U21_139: D60.1 D60.2 R349.1 U21.139 | length 21.5
  F.Cu w0.08: v2(-14.3,2.94) -12.37,2.94 v3(-12.04,2.61) ; v3(-12.06,6.23) -11.68,6.61 U21.139@-11.68,8.535
  In1.Cu w0.08: v3(-12.06,6.23) -12.04,6.21 v3(-12.04,2.61)
  B.Cu w0.08: -23.058,1.47 -21.32,1.47 -21.17,1.62 -19.51,1.62 -19.19,1.94 -16.16,1.94 -15.16,2.94 v2(-14.3,2.94)
  B.Cu w0.3: R349.1@-24.76,1.1 -23.128,1.1 -23.058,1.03 ; D60.1@-23.057,0.01 -23.058,1.03 ; D60.2@-23.057,1.91 -23.058,1.47 -23.058,1.03
U30_D0: R90.2 U30.2 U35.1 | length 102
  F.Cu w0.08: U30.2@-50.86,-11.82 -50.82,-11.78 v3(-50.12,-11.78) -49.78,-11.78 -49.63,-11.63 -47.95,-11.63 -47.5,-12.08 -47.5,-13.12 v3(-46.92,-13.7) ; R90.2@-50.63,-9.74 -49.93,-9.74 -49.61,-10.06 v3(-49.61,-10.65) ; v3(-43.74,-13.58) -43.69,-13.58 -43.33,-13.22 -41.26,-13.22 v3(-40.96,-12.92) ; v3(-39.91,-5.16) v3(-35.01,-5.16) ; v3(-29.55,-5.94) -27.69,-5.94 -27.44,-6.19 -27.44,-7.85 -26.99,-8.3 v3(-26.69,-8.3) ; v3(-26.59,-14.62) -25.88,-14.62 -25.01,-15.49 -25.01,-16.75 -24.745,-17.015 -23.285,-17.015 -22.68,-16.41 -19.12,-16.41 -19.01,-16.52 -13.97,-16.52 -13.3,-17.19 -11.96,-17.19 -11.3,-17.85 -10.16,-17.85 -9.61,-18.4 -9.61,-18.94 -9.18,-19.37 -1.68,-19.37 -1.41,-19.1 -1.41,-18.48 -1.15,-18.22 v3(-0.92,-18.22) ; v3(9.22,-16.25) 13.94,-16.25 14.36,-15.83 17.98,-15.83 18.11,-15.7 U35.1@18.11,-14.5
  In1.Cu w0.08: v3(-50.12,-11.78) -50.12,-11.16 v3(-49.61,-10.65) ; v3(-46.92,-13.7) -46.92,-13.83 -46.57,-14.18 -44.34,-14.18 v3(-43.74,-13.58) ; v3(-40.96,-12.92) -40.39,-12.35 -40.39,-5.39 -40.16,-5.16 v3(-39.91,-5.16) ; v3(-35.01,-5.16) -35.01,-6.17 -34.23,-6.95 -30.08,-6.95 -29.55,-6.42 v3(-29.55,-5.94) ; v3(-26.69,-8.3) -26.69,-8.64 -26.62,-8.71 -26.62,-14.59 v3(-26.59,-14.62) ; v3(-0.92,-18.22) -0.49,-17.79 -0.49,-17.13 -1.02,-16.6 -1.02,-15.89 -0.49,-15.36 0.69,-15.36 1.7,-14.35 7.32,-14.35 v3(9.22,-16.25)
U32_R: Q12.3 R81.2 U32.1 U32.13 | length 14.5
  F.Cu w0.08: R81.2@-39.49,-10.46 -38.91,-10.46 -38.75,-10.3 -38.53,-10.3 -37.98,-9.75 -36.3,-9.75 Q12.3@-36.29,-9.76 -36.29,-10.55 -36.93,-11.19 -36.93,-11.46 -36.69,-11.7 U32.1@-35.78,-11.7 ; v3(-32.03,-10.62) -31.7,-10.62 -31.36,-10.96 -31.36,-11.98 -30.99,-12.35 U32.13@-30.055,-12.35
  F.Cu w0.3: U32.1@-35.78,-11.7 v3(-34.64,-11.7)
  In1.Cu w0.08: v3(-34.64,-11.7) -34.64,-11.15 -34.11,-10.62 v3(-32.03,-10.62)
U53_2CLK: R82.1 U30.3 U35.3 U40.11 | length 150.4
  F.Cu w0.08: R82.1@-52.5,-12.48 -52.49,-12.47 U30.3@-50.86,-12.47 -50.13,-12.47 -49.58,-11.92 v3(-48.72,-11.92) ; v3(-48.72,-10.75) -47.4,-10.75 v3(-47.38,-10.73) ; v2(17.05,-2.14) 18.19,-2.14 v3(18.2,-2.13) ; v3(17.95,-4.33) 17.95,-4.34 19.13,-5.52 v3(19.13,-5.53) ; v3(22.03,-23.39) 22.18,-23.54 26.96,-23.54 27.41,-23.99 27.41,-24.37 27.7,-24.66 28.03,-24.66 28.54,-24.15 32.76,-24.15 v3(33.06,-24.45)
  F.Cu w0.3: v3(47.4,-30.32) 47.9,-29.82 U40.11@47.9,-29.1
  In1.Cu w0.08: v2(-48.93,-2.38) -48.22,-2.38 -47.38,-3.22 v3(-47.38,-10.73) ; v3(-48.72,-11.92) v3(-48.72,-10.75) ; v3(17.95,-4.33) 17.95,-3.45 18.2,-3.2 v3(18.2,-2.13) ; v3(19.13,-5.53) 19.22,-5.62 19.22,-11.33 18.97,-11.58 18.97,-12.54 v3(17.01,-14.5) 17.01,-14.74 17.68,-15.41 18.79,-15.41 19.53,-16.15 21.72,-16.15 22.04,-16.47 22.04,-19.99 22.4,-20.35 22.4,-22.29 22.03,-22.66 v3(22.03,-23.39) ; v3(33.06,-24.45) 33.79,-25.18 33.79,-27.23 34.69,-28.13 37.44,-28.13 37.78,-28.47 37.78,-29.16 38.47,-29.85 41.8,-29.85 42.18,-29.47 47.14,-29.47 47.4,-29.73 v3(47.4,-30.32)
  In3.Cu w0.08: v2(-48.93,-2.38) -45.04,-2.38 -43.78,-3.64 -41.96,-3.64 -40.905,-4.695 -39.705,-4.695 -38.62,-3.61 -38.62,-1.7 -36.56,0.36 -26.24,0.36 -25.51,-0.37 -20.74,-0.37 -20.31,-0.8 -6.79,-0.8 -5.93,0.06 -5.25,0.06 -4.69,-0.5 -4.17,-0.5 -3.45,0.22 -0.66,0.22 1.36,-1.8 4.75,-1.8 5.65,-0.9 16.43,-0.9 17.05,-1.52 v2(17.05,-2.14)
U54_1PRE#: U29.4 U54.4 | length 83.1
  F.Cu w0.08: v3(-47.5,-16.77) -47.4,-16.67 -41.27,-16.67 U29.4@-40.71,-16.11
  In1.Cu w0.08: v2(-47.5,-22.69) v3(-47.5,-16.77)
  In6.Cu w0.08: v2(-50.06,38.8) -49.15,38.8 -48.375,38.025 -48.375,33.485 -47.9,33.01 -47.9,27.875 -48.915,26.86 -49.24,26.86 -50.075,26.025 -50.075,18.675 -52,16.75 -52,-8.075 -51.2,-8.875 -51.2,-19.6 -48.11,-22.69 v2(-47.5,-22.69)
  B.Cu w0.08: v2(-50.06,38.8) -49.68,38.8 -49.52,38.64 -49.52,37.7 -49.33,37.51 U54.4@-48.055,37.51
U54_Q: D11.2 J5.25 R235.2 U54.5 | length 108.3
  F.Cu w0.3: v3(-44.37,-0.15) -44.315,-0.205 D11.2@-43.36,-0.205
  In1.Cu w0.08: v2(-46.61,-5.98) -44.34,-3.71 -44.34,-0.18 v3(-44.37,-0.15) ; v2(-39.78,32.43) -40.95,31.26 -40.95,26 -40.24,25.29 -40.24,22.86 -40.66,22.44 -40.66,21.49 -41.51,20.64 -42.48,20.64 -42.98,20.14 -42.98,19.7 -42.56,19.28 -34.76,19.28 -34.44,18.96 -32.32,18.96 -31.35,19.93 -29.78,19.93 v3(-29.18,19.33)
  In3.Cu w0.08: v2(-51.9,33.52) -47.39,33.52 ; v2(-48.37,41.45) -47.38,40.46 -47.38,33.53 -47.39,33.52 ; v2(-39.78,32.43) -45.33,32.43 -46.42,33.52 -47.39,33.52
  In4.Cu w0.08: v2(-51.9,33.52) -53.59,31.83 -53.59,30.05 -51.3,27.76 -51.3,25.71 -49.67,24.08 -49.67,4.28 -47.04,1.65 -47.04,-5.56 -46.62,-5.98 v2(-46.61,-5.98)
  B.Cu w0.08: v2(-48.37,41.45) -47.63,40.71 R235.2@-46.12,40.71 -46.12,39 -46.96,38.16 U54.5@-48.055,38.16
U61_RAM_LCASL#: R272.1 U61.D8 | length 13.5
  In8.Cu w0.08: v1(-17.32,15.59) -16.37,15.59 -16.07,15.29 -14.42,15.29 -14.4,15.31 -13.72,15.31 -13.33,14.92 -8.51,14.92 -8.09,14.5 v1(-8.09,12.56)
  B.Cu w0.08: R272.1@-18.95,15.13 -17.78,15.13 v1(-17.32,15.59) ; v1(-8.09,12.56) -8.075,12.575 U61.D8@-8.075,12.585
U61_RAM_LCASU#: R274.1 U61.A9 | length 11.7
  In8.Cu w0.08: v1(-17.34,14.61) -17.34,14.17 -17.22,14.05 v1(-17.22,13.18) ; v1(-14.51,11.78) -14.49,11.76 v1(-11.94,11.76)
  B.Cu w0.08: R274.1@-19.97,15.13 -19.97,14.94 -19.64,14.61 v1(-17.34,14.61) ; v1(-17.22,13.18) -16.81,13.18 -16.46,12.83 -16.46,11.87 -16.13,11.54 -14.75,11.54 v1(-14.51,11.78) ; v1(-11.94,11.76) -11.87,11.69 U61.A9@-11.87,11.19
U61_RAM_RAMWE#: R154.2 U61.B8 | length 40.9
  F.Cu w0.08: v3(-20.67,-9.18) -18.8,-9.18 -18.3,-8.68 -18.3,-7.34 -17.99,-7.03 v3(-17.99,-6.6)
  F.Cu w0.3: R154.2@-21.36,-17.19 v3(-20.87,-17.19)
  In1.Cu w0.08: v3(-20.87,-17.19) -20.87,-15.54 -20.43,-15.1 -20.43,-12.09 -20.67,-11.85 v3(-20.67,-9.18) ; v3(-17.99,-6.6) -16.95,-5.56 -16.95,0.34 v2(-17.88,1.27)
  In8.Cu w0.08: v1(-13.24,4.87) -13.24,5.48 -13.15,5.57 -13.15,7.34 -12.9,7.59 v1(-12.9,7.92)
  B.Cu w0.08: v2(-17.88,1.27) -16.03,1.27 -15.75,0.99 -14.01,0.99 -13.24,1.76 v1(-13.24,4.87) ; v1(-12.9,7.92) -12.9,8.99 -12.62,9.27 -12.62,12.63 -12.15,13.1 -11.24,13.1 U61.B8@-10.6,12.46
U61_RAM_RAS0: R101.2 U61.C13 | length 25.9
  In1.Cu w0.08: v2(-20.6,-5.13) -20.6,-6.56 -20.42,-6.74 -20.42,-8.64 -20.17,-8.89 -20.17,-9.69 -20.03,-9.83 v3(-19.57,-9.83)
  In8.Cu w0.08: v2(-20.6,-5.13) -19.26,-3.79 -19.26,-1.89 -18.77,-1.4 v1(-18.32,-1.4) ; v1(-10.74,-1.1) -10.28,-0.64 -10.28,2.5 v1(-10.04,2.74)
  B.Cu w0.08: v1(-18.32,-1.4) -18.07,-1.15 -10.79,-1.15 v1(-10.74,-1.1) ; v1(-10.04,2.74) -10.04,5.59 -9.52,6.11 U61.C13@-9.33,6.11
U61_RAM_RAS2: R103.2 U61.B13 | length 23.7
  F.Cu w0.08: R103.2@-19.57,-8.58 -18.81,-8.58 -18.51,-8.28 -18.51,-6.43 -18,-5.92 -18,-4.7 -18.69,-4.01 -18.69,-2.63 -18.76,-2.56 -18.76,0.41 v2(-18.7,0.47)
  In8.Cu w0.08: v1(-13.41,0.38) -13.41,0.91 v1(-12.9,1.42)
  B.Cu w0.08: v2(-18.7,0.47) -18.19,-0.04 -14.11,-0.04 -13.69,0.38 v1(-13.41,0.38) ; v1(-12.9,1.42) -12.9,4.83 -12.31,5.42 -11.29,5.42 U61.B13@-10.6,6.11
U61_RAM_RAS3: R106.2 U61.A13 | length 22.7
  F.Cu w0.08: v3(-21.47,-0.15) -21.47,-3.5 -21.41,-3.56 -21.41,-4.21 -21.52,-4.32 -21.52,-6.05 -21,-6.57 -19.9,-6.57 -19.57,-6.9 R106.2@-19.57,-7.14
  In1.Cu w0.08: v3(-21.47,-0.15) -21.47,0.22 -19.9,1.79 -19.72,1.79 v2(-18.83,2.68)
  In8.Cu w0.08: v1(-13.94,3.37) -13.94,4.07 -13.77,4.24 -12.43,4.24 -11.91,4.76 v1(-11.91,5.92)
  B.Cu w0.08: v2(-18.83,2.68) -18.33,2.68 -17.88,2.23 -16.61,2.23 -15.25,3.59 -14.16,3.59 v1(-13.94,3.37) ; v1(-11.91,5.92) -11.91,6.07 U61.A13@-11.87,6.11
U61_RAM_UCASL#: R159.2 U61.A8 | length 37.4
  F.Cu w0.3: v3(-19.85,-15.42) -19.85,-15.59 R159.2@-19.59,-15.85
  In1.Cu w0.08: v3(-19.85,-15.42) -20.03,-15.24 -20.03,-10.84 -19.2,-10.01 -19.2,-8.16 v2(-19.51,-7.85)
  In8.Cu w0.08: v1(-15.06,-8.04) -15.08,-8.02 -15.08,-7.72 -15.15,-7.65 -15.15,6.47 -14.54,7.08 -13.87,7.08 -13.644,7.306 v1(-13.644,7.796) ; v1(-13.51,12.46) -12.15,12.46 v1(-12.07,12.38)
  B.Cu w0.08: v2(-19.51,-7.85) -19.51,-8.34 -19.14,-8.71 -17.87,-8.71 -17.2,-8.04 v1(-15.06,-8.04) ; v1(-13.644,7.796) -13.644,8.646 -13.51,8.78 v1(-13.51,12.46) ; v1(-12.07,12.38) -12.07,12.4 U61.A8@-11.885,12.585
U61_RAM_UCASU#: R261.1 U61.D9 | length 20.2
  In8.Cu w0.08: v1(-16.97,14.3) -16.97,13.66 -16.86,13.55 -16.86,13.12 -16.95,13.03 v1(-16.95,12.81) ; v1(-13.23,10.21) -12.91,10.21 -12.76,10.06 -8.63,10.06 -8.1,10.59 v1(-8.1,10.95)
  B.Cu w0.08: R261.1@-21.07,15.13 -21.07,14.96 -20.41,14.3 v1(-16.97,14.3) ; v1(-16.95,12.81) -16.66,12.52 -16.66,11.57 -16.45,11.36 -14.45,11.36 -14.2,11.61 -14.2,12.25 -13.67,12.78 -13.39,12.78 -13.23,12.62 v1(-13.23,10.21)
U61_RTCBAT_470K: Q26.3 R248.1 U61.P10 | length 25.6
  In8.Cu w0.08: v1(4.66,10.04) 4.66,12.04 5.16,12.54 6.39,12.54 6.84,12.99 6.84,14.45 7.05,14.66 9.13,14.66 9.19,14.6 v1(10.25,14.6) ; v1(11.46,14.63) 11.46,18.15 11.01,18.6 11.01,23.57 11.64,24.2 v1(12.13,24.2)
  B.Cu w0.08: v1(10.25,14.6) 11.43,14.6 v1(11.46,14.63) ; v1(12.13,24.2) 13.45,24.2 13.94,24.69 R248.1@13.94,25.21 R248.1@13.91,25.24
  B.Cu w0.2: R248.1@13.91,25.24 Q26.3@13.91,26.99
U71_OR1_IN2: U7.19 U71.2 | length 124.7
  F.Cu w0.08: U7.19@-16.937,13.075 -15.825,13.075 v2(-15.75,13)
  In5.Cu w0.08: v2(-15.75,13) -15.16,12.41 -14.68,12.41 -14.17,12.92 -9.68,12.92 -8.4,11.64 -3.59,11.64 -1.77,9.82 7.66,9.82 8.93,11.09 16.18,11.09 16.51,10.76 17.91,10.76 18.34,11.19 21.48,11.19 22.11,10.56 23.69,10.56 26.41,7.84 29.63,7.84 30.56,6.91 35.9,6.91 36.16,7.17 37.02,7.17 37.49,7.64 37.49,8.94 37.99,9.44 43.19,9.44 45.38,7.25 48.47,7.25 51.73,3.99 54.12,3.99 54.72,4.59 54.72,6.12 v5(54.39,6.45)
  In6.Cu w0.08: v5(54.39,6.45) 54.93,6.45 55.14,6.66 56.48,6.66 56.83,6.31 56.83,4.09 55.72,2.98 53.96,2.98 51.02,0.04 51.02,-2.41 52.28,-3.67 58.37,-3.67 61.675,-6.975 61.675,-8.1 61.25,-8.525 61.25,-9.86 58.25,-12.86 58.25,-15.74 59.4,-16.89 v4(59.4,-18.46)
  B.Cu w0.08: U71.2@57.937,-18.73 59.13,-18.73 v4(59.4,-18.46)
U106_1CLK: R80.2 U6.11 U32.3 | length 51.6
  F.Cu w0.08: R80.2@-37.79,-11.59 -37.79,-12.13 -36.94,-12.98 v2(-36.8,-12.98)
  F.Cu w0.2: U6.11@-44.15,19.88 -44.15,18.71 v3(-44.07,18.63)
  F.Cu w0.3: v2(-36.8,-12.98) -36.78,-13 U32.3@-35.78,-13
  In1.Cu w0.08: v2(-48.95,-10.28) -49.56,-9.67 -49.56,-6.54 -49.46,-6.44 -49.46,-3.68 -49.64,-3.5 -49.64,2.76 -48.05,4.35 -48.05,11.14 -47.16,12.03 -47.16,13.92 -47.36,14.12 -47.36,16.45 ; v7(-48.88,16.46) -48.87,16.45 -47.36,16.45 ; v3(-44.07,18.63) -44.09,18.63 -45.4,17.32 -46.89,17.32 -47.36,16.85 -47.36,16.45
  In5.Cu w0.08: v2(-48.95,-10.28) -47.7,-11.53 -38.25,-11.53 v2(-36.8,-12.98)
unconnected-(C51-+-Pad1): C51.1 D6.3 D7.2 R68.1 | length 9.4
  F.Cu w0.5: D6.3@-11.35,19.625 -11.35,19.9 -12.885,21.435 D7.2@-12.885,22.2 -12.885,24.355 -12.635,24.605 C51.1@-11.85,24.605 -10.745,24.605 -9.94,23.8 R68.1@-9.333,23.8
unconnected-(C131-Pad1): C131.1 Q37.2 U41.28 | length 14
  F.Cu w0.5: U41.28@79.96,-38.79 79.995,-38.825 C131.1@82.18,-38.825 82.23,-38.875 v4(82.23,-39.93)
  B.Cu w0.5: v4(82.23,-39.93) 86.9,-39.93 87.6,-39.23 Q37.2@87.6,-34.267
unconnected-(C132-Pad1): C132.1 C134.2 U41.10 | length 4.1
  F.Cu w0.5: C134.2@66.905,-23.2 66.915,-23.21 C132.1@68.67,-23.21 68.46,-23.42 U41.10@68.46,-25.44
unconnected-(D4-Pad1): D4.1 | length 16.1
  In1.Cu w0.08: v3(-22.39,26.81) -21.65,26.81 -21.42,27.04 -20.6,27.04 -20.5,26.94 v2(-20.5,26.56) -20.5,25.89 -18.37,23.76 -17.43,23.76 -16.33,22.66 -16.33,20.56 -15.34,19.57 -15.34,18.93 -14.89,18.48 -14.88,18.48 -13.25,16.85 -13.19,16.85 v3(-12.96,16.62)
unconnected-(D6-NC-Pad1): D6.1
unconnected-(D7-NC-Pad1): D7.1
unconnected-(D10-common-Pad3): D10.3
unconnected-(D13-common-Pad3): D13.3
unconnected-(D58-common-Pad3): D58.3
unconnected-(D59-A-Pad1): D59.1
unconnected-(D59-A-Pad3): D59.3
unconnected-(D59-K-Pad2): D59.2
unconnected-(J5-Pin_6-Pad6): J5.6
unconnected-(J10-NC-Pad47): J10.47
unconnected-(J10-NC-Pad117): J10.117
unconnected-(J11-DMACK#-Pad38): J11.38
unconnected-(J11-DMREQ-Pad36): J11.36
unconnected-(J11-VS2-Pad30): J11.30
unconnected-(J11-WE#-Pad22): J11.22
unconnected-(J13-NC-Pad32): J13.32
unconnected-(J13-NC-Pad34): J13.34
unconnected-(J13-NC-Pad35): J13.35
unconnected-(J13-NC-Pad37): J13.37
unconnected-(J13-NC-Pad43): J13.43
unconnected-(J13-NC-Pad44): J13.44
unconnected-(J13-NC-Pad45): J13.45
unconnected-(J13-NC-Pad47): J13.47
unconnected-(J13-NC-Pad49): J13.49
unconnected-(J16-Pin_1-Pad1): J16.1
unconnected-(J19-Pin_1-Pad1): J19.1
unconnected-(Q28-C-Pad3): Q28.3
unconnected-(U1-NC-Pad1): U1.1
unconnected-(U3-IRDA_LED_K-Pad4): U3.4
unconnected-(U4-GamePad-Pad13): U4.13
unconnected-(U4-NC-Pad3): U4.3
unconnected-(U4-NC-Pad12): U4.12
unconnected-(U4-NC-Pad15): U4.15
unconnected-(U4-NC-Pad17): U4.17
unconnected-(U4-NC-Pad19): U4.19
unconnected-(U6-P24-Pad34): U6.34
unconnected-(U6-P25-Pad33): U6.33
unconnected-(U6-P26-Pad32): U6.32
unconnected-(U6-P42-Pad22): U6.22
unconnected-(U6-P47-Pad17): U6.17
unconnected-(U6-P54-Pad12): U6.12
unconnected-(U6-P56-Pad10): U6.10
unconnected-(U6-SEG10-Pad60): U6.60
unconnected-(U6-SEG11-Pad59): U6.59
unconnected-(U7-B1-Pad21): U7.21
unconnected-(U7-B2-Pad20): U7.20
unconnected-(U8-NC-Pad11): U8.11
unconnected-(U8-NC-Pad12): U8.12
unconnected-(U8-NC-Pad15): U8.15
unconnected-(U8-NC-Pad30): U8.30
unconnected-(U10-IRQ#-Pad2): U10.2
unconnected-(U10-NC-Pad8): U10.8
unconnected-(U10-NC-Pad9): U10.9
unconnected-(U10-NC-Pad19): U10.19
unconnected-(U10-NC-Pad22): U10.22
unconnected-(U13-NC-Pad4): U13.4
unconnected-(U14-NC-Pad1): U14.1
unconnected-(U15-NC-Pad1): U15.1
unconnected-(U16-NC-Pad4): U16.4
unconnected-(U17-NC-Pad4): U17.4
unconnected-(U18A-Q-Pad5): U18.5
unconnected-(U18B-Q-Pad9): U18.9
unconnected-(U19-Pad3): U19.3
unconnected-(U21-NC-Pad132): U21.132
unconnected-(U21-NC-Pad135): U21.135
unconnected-(U21-NC-Pad137): U21.137
unconnected-(U22-DENSELCT-Pad99): U22.99
unconnected-(U22-DS1#-Pad1): U22.1
unconnected-(U22-IDEENHI#-Pad22): U22.22
unconnected-(U22-IDEENLO#-Pad21): U22.21
unconnected-(U22-MTR1#-Pad3): U22.3
unconnected-(U22-X2{slash}CLK2-Pad19): U22.19
unconnected-(U23-NC-Pad1): U23.1
unconnected-(U27-NC-Pad6): U27.6
unconnected-(U27-NC-Pad9): U27.9
unconnected-(U27-NC-Pad10): U27.10
unconnected-(U28-NC-Pad11): U28.11
unconnected-(U28-NC-Pad12): U28.12
unconnected-(U28-NC-Pad13): U28.13
unconnected-(U28-NC-Pad33): U28.33
unconnected-(U28-NC-Pad34): U28.34
unconnected-(U30A-Q-Pad5): U30.5
unconnected-(U31-NC-Pad4): U31.4
unconnected-(U32A-{\S\}\-\P\a\d\4\)\: U32.4
unconnected-(U32B-{\Q\}\-\P\a\d\8\)\: U32.8
unconnected-(U33-NC-Pad11): U33.11
unconnected-(U33-NC-Pad12): U33.12
unconnected-(U33-NC-Pad13): U33.13
unconnected-(U33-NC-Pad33): U33.33
unconnected-(U33-NC-Pad34): U33.34
unconnected-(U35-NC-Pad47): U35.47
unconnected-(U35-NC-Pad49): U35.49
unconnected-(U35-NC-Pad59): U35.59
unconnected-(U35-NC-Pad80): U35.80
unconnected-(U35-NC-Pad82): U35.82
unconnected-(U35-NC-Pad84): U35.84
unconnected-(U35-NC-Pad85): U35.85
unconnected-(U35-NC-Pad91): U35.91
unconnected-(U35-NC-Pad92): U35.92
unconnected-(U35-NC-Pad94): U35.94
unconnected-(U35-NC-Pad96): U35.96
unconnected-(U35-NC-Pad98): U35.98
unconnected-(U35-NC-Pad99): U35.99
unconnected-(U35-NC-Pad100): U35.100
unconnected-(U36-NC-Pad1): U36.1
unconnected-(U36-NC-Pad2): U36.2
unconnected-(U36-NC-Pad3): U36.3
unconnected-(U36-NC-Pad46): U36.46
unconnected-(U36-NC-Pad47): U36.47
unconnected-(U36-NC-Pad48): U36.48
unconnected-(U40A-Q-Pad5): U40.5
unconnected-(U40B-Q-Pad9): U40.9
unconnected-(U41-NC-Pad9): U41.9
unconnected-(U41-NC-Pad11): U41.11
unconnected-(U41-NC-Pad14): U41.14
unconnected-(U42-INPACK-Pad48): U42.48
unconnected-(U42-IO1-Pad67): U42.67
unconnected-(U42-IO2-Pad68): U42.68
unconnected-(U42-REG-Pad45): U42.45
unconnected-(U42-SCLK0-Pad54): U42.54
unconnected-(U42-SO2-Pad69): U42.69
unconnected-(U42-SO3-Pad63): U42.63
unconnected-(U42-TEST-Pad64): U42.64
unconnected-(U42-WE-Pad41): U42.41
unconnected-(U45A-{\Q\}\-\P\a\d\4\)\: U45.4
unconnected-(U46-NC-Pad3): U46.3
unconnected-(U46-NC-Pad5): U46.5
unconnected-(U46-NC-Pad6): U46.6
unconnected-(U46-NC-Pad8): U46.8
unconnected-(U46-NC-Pad9): U46.9
unconnected-(U46-NC-Pad11): U46.11
unconnected-(U46-NC-Pad13): U46.13
unconnected-(U46-NC-Pad15): U46.15
unconnected-(U48-D-Pad3): U48.3
unconnected-(U50-NC-Pad4): U50.4
unconnected-(U50-NC-Pad5): U50.5
unconnected-(U51-ACTI-PadD5): U51.D5
unconnected-(U51-CASBH#-PadC3): U51.C3
unconnected-(U51-CASBL#-PadA1): U51.A1
unconnected-(U51-ENABKL-PadC4): U51.C4
unconnected-(U51-M-PadC8): U51.C8
unconnected-(U51-OEH#-PadD10): U51.D10
unconnected-(U51-PadF6): U51.F6
unconnected-(U51-PadF7): U51.F7
unconnected-(U51-PadF8): U51.F8
unconnected-(U51-PadG6): U51.G6
unconnected-(U51-PadG7): U51.G7
unconnected-(U51-PadG8): U51.G8
unconnected-(U51-PadH6): U51.H6
unconnected-(U51-PadH7): U51.H7
unconnected-(U51-PadH8): U51.H8
unconnected-(U51-RASB#-PadA2): U51.A2
unconnected-(U51-WEB#-PadD4): U51.D4
unconnected-(U51-XTAL0-PadL10): U51.L10
unconnected-(U52-NC-Pad1): U52.1
unconnected-(U53-NC-Pad4): U53.4
unconnected-(U54B-{\Q\}\-\P\a\d\8\)\: U54.8
unconnected-(U55-NC-Pad4): U55.4
unconnected-(U55-NC-Pad5): U55.5
unconnected-(U56-Pad8): U56.8
unconnected-(U56-Pad11): U56.11
unconnected-(U58-NC-Pad1): U58.1
unconnected-(U59-DU-Pad12): U59.12
unconnected-(U59-NC-Pad13): U59.13
unconnected-(U59-NC-Pad29): U59.29
unconnected-(U59-NC-Pad37): U59.37
unconnected-(U59-NC-Pad38): U59.38
unconnected-(U61-PadA14): U61.A14
unconnected-(U61-PadA15): U61.A15
unconnected-(U61-PadB14): U61.B14
unconnected-(U61-PadC14): U61.C14
unconnected-(U61-PadE7): U61.E7
unconnected-(U61-PadE8): U61.E8
unconnected-(U61-PadE9): U61.E9
unconnected-(U61-PadE10): U61.E10
unconnected-(U61-PadF3): U61.F3
unconnected-(U61-PadF5): U61.F5
unconnected-(U61-PadF7): U61.F7
unconnected-(U61-PadF8): U61.F8
unconnected-(U61-PadF9): U61.F9
unconnected-(U61-PadF10): U61.F10
unconnected-(U61-PadF15): U61.F15
unconnected-(U61-PadF16): U61.F16
unconnected-(U61-PadG5): U61.G5
unconnected-(U61-PadG6): U61.G6
unconnected-(U61-PadG7): U61.G7
unconnected-(U61-PadG8): U61.G8
unconnected-(U61-PadG9): U61.G9
unconnected-(U61-PadG10): U61.G10
unconnected-(U61-PadG11): U61.G11
unconnected-(U61-PadG12): U61.G12
unconnected-(U61-PadH5): U61.H5
unconnected-(U61-PadH6): U61.H6
unconnected-(U61-PadH7): U61.H7
unconnected-(U61-PadH8): U61.H8
unconnected-(U61-PadH9): U61.H9
unconnected-(U61-PadH10): U61.H10
unconnected-(U61-PadH11): U61.H11
unconnected-(U61-PadH12): U61.H12
unconnected-(U61-PadJ5): U61.J5
unconnected-(U61-PadJ6): U61.J6
unconnected-(U61-PadJ7): U61.J7
unconnected-(U61-PadJ8): U61.J8
unconnected-(U61-PadJ9): U61.J9
unconnected-(U61-PadJ10): U61.J10
unconnected-(U61-PadJ11): U61.J11
unconnected-(U61-PadJ12): U61.J12
unconnected-(U61-PadK5): U61.K5
unconnected-(U61-PadK6): U61.K6
unconnected-(U61-PadK7): U61.K7
unconnected-(U61-PadK8): U61.K8
unconnected-(U61-PadK9): U61.K9
unconnected-(U61-PadK10): U61.K10
unconnected-(U61-PadK11): U61.K11
unconnected-(U61-PadK12): U61.K12
unconnected-(U61-PadK13): U61.K13
unconnected-(U61-PadK16): U61.K16
unconnected-(U61-PadL7): U61.L7
unconnected-(U61-PadL8): U61.L8
unconnected-(U61-PadL9): U61.L9
unconnected-(U61-PadL10): U61.L10
unconnected-(U61-PadL11): U61.L11
unconnected-(U61-PadM7): U61.M7
unconnected-(U61-PadM8): U61.M8
unconnected-(U61-PadM9): U61.M9
unconnected-(U61-PadM10): U61.M10